# Altium PCB MineSafe.PcbDoc
Units mil, origin at the board's own origin, x right, y up, seen from the top; angles counter-clockwise.
Board outline 3025 x 4000 mil, 2 copper layers (Top Layer, Bottom Layer); 32 components, 29 nets, 154 pads, 40 vias.
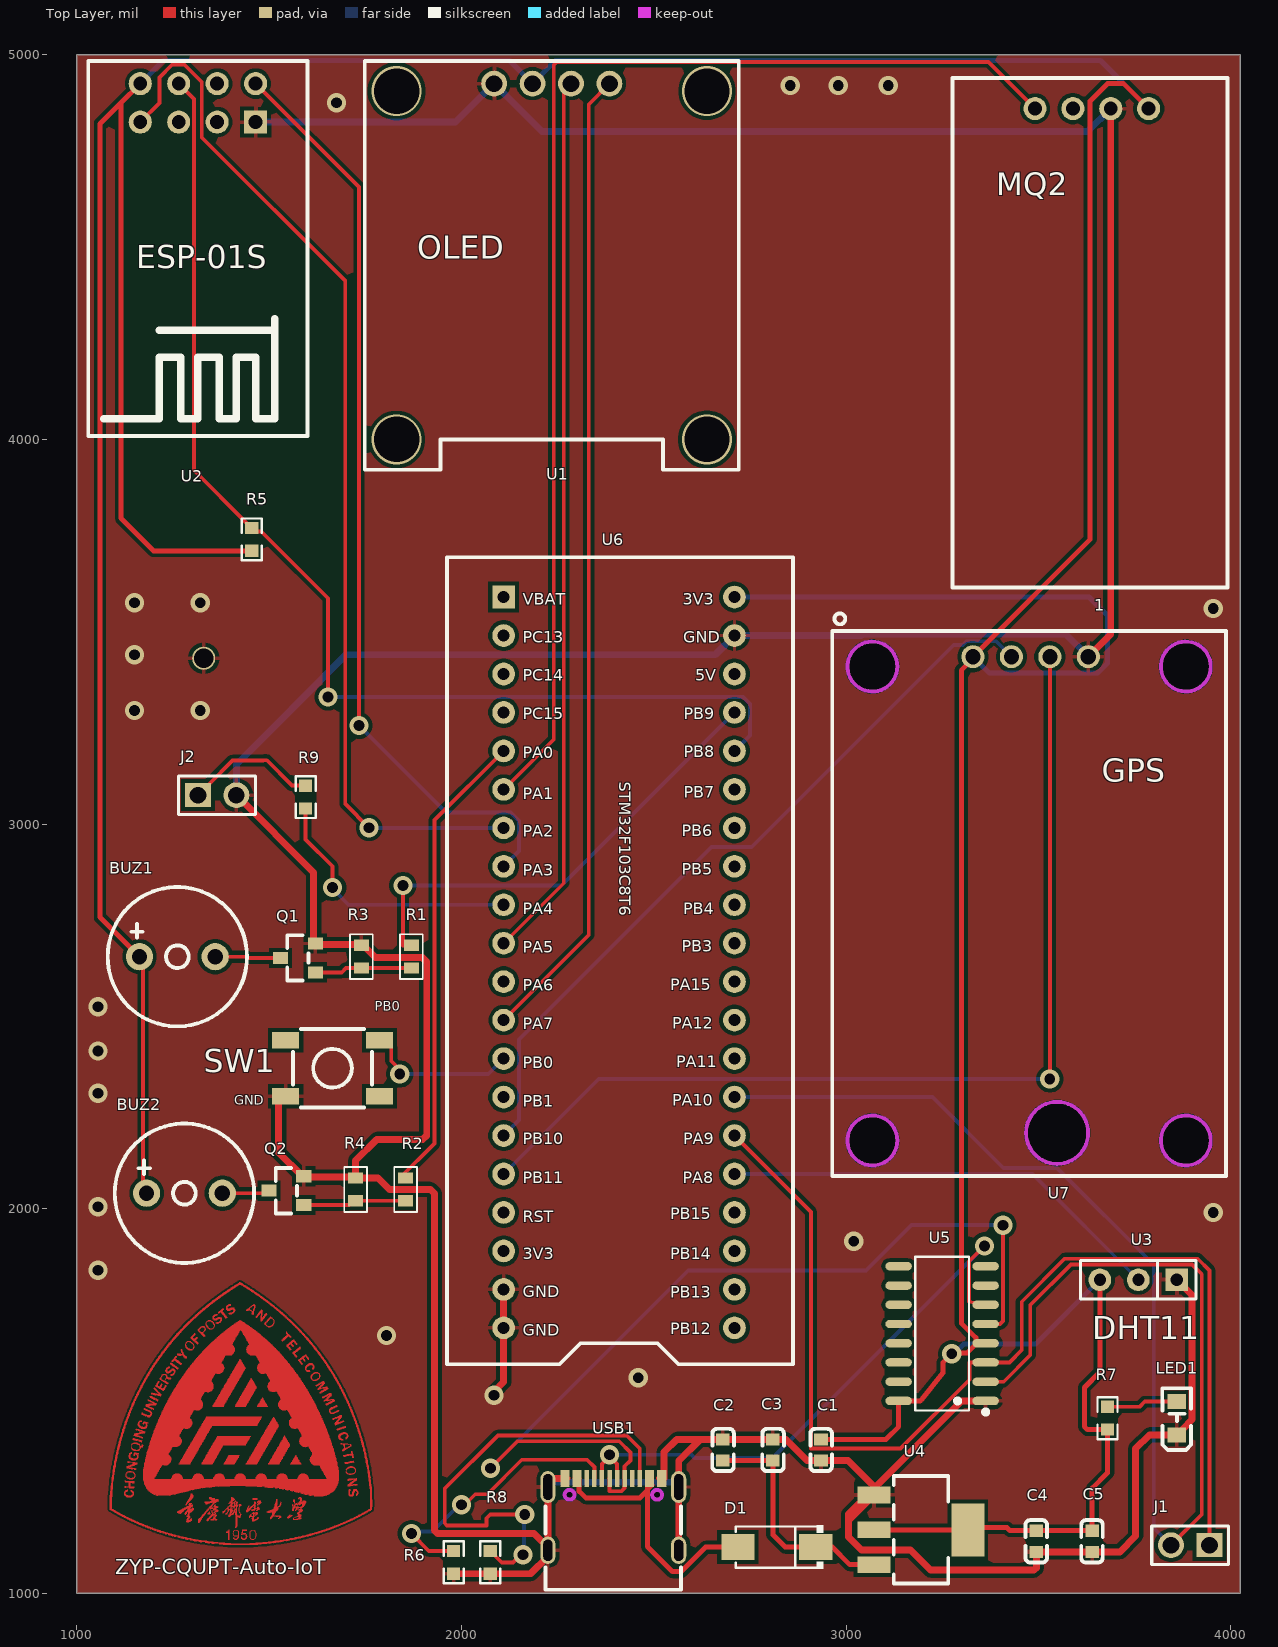
[diagram p0: Top Layer view]
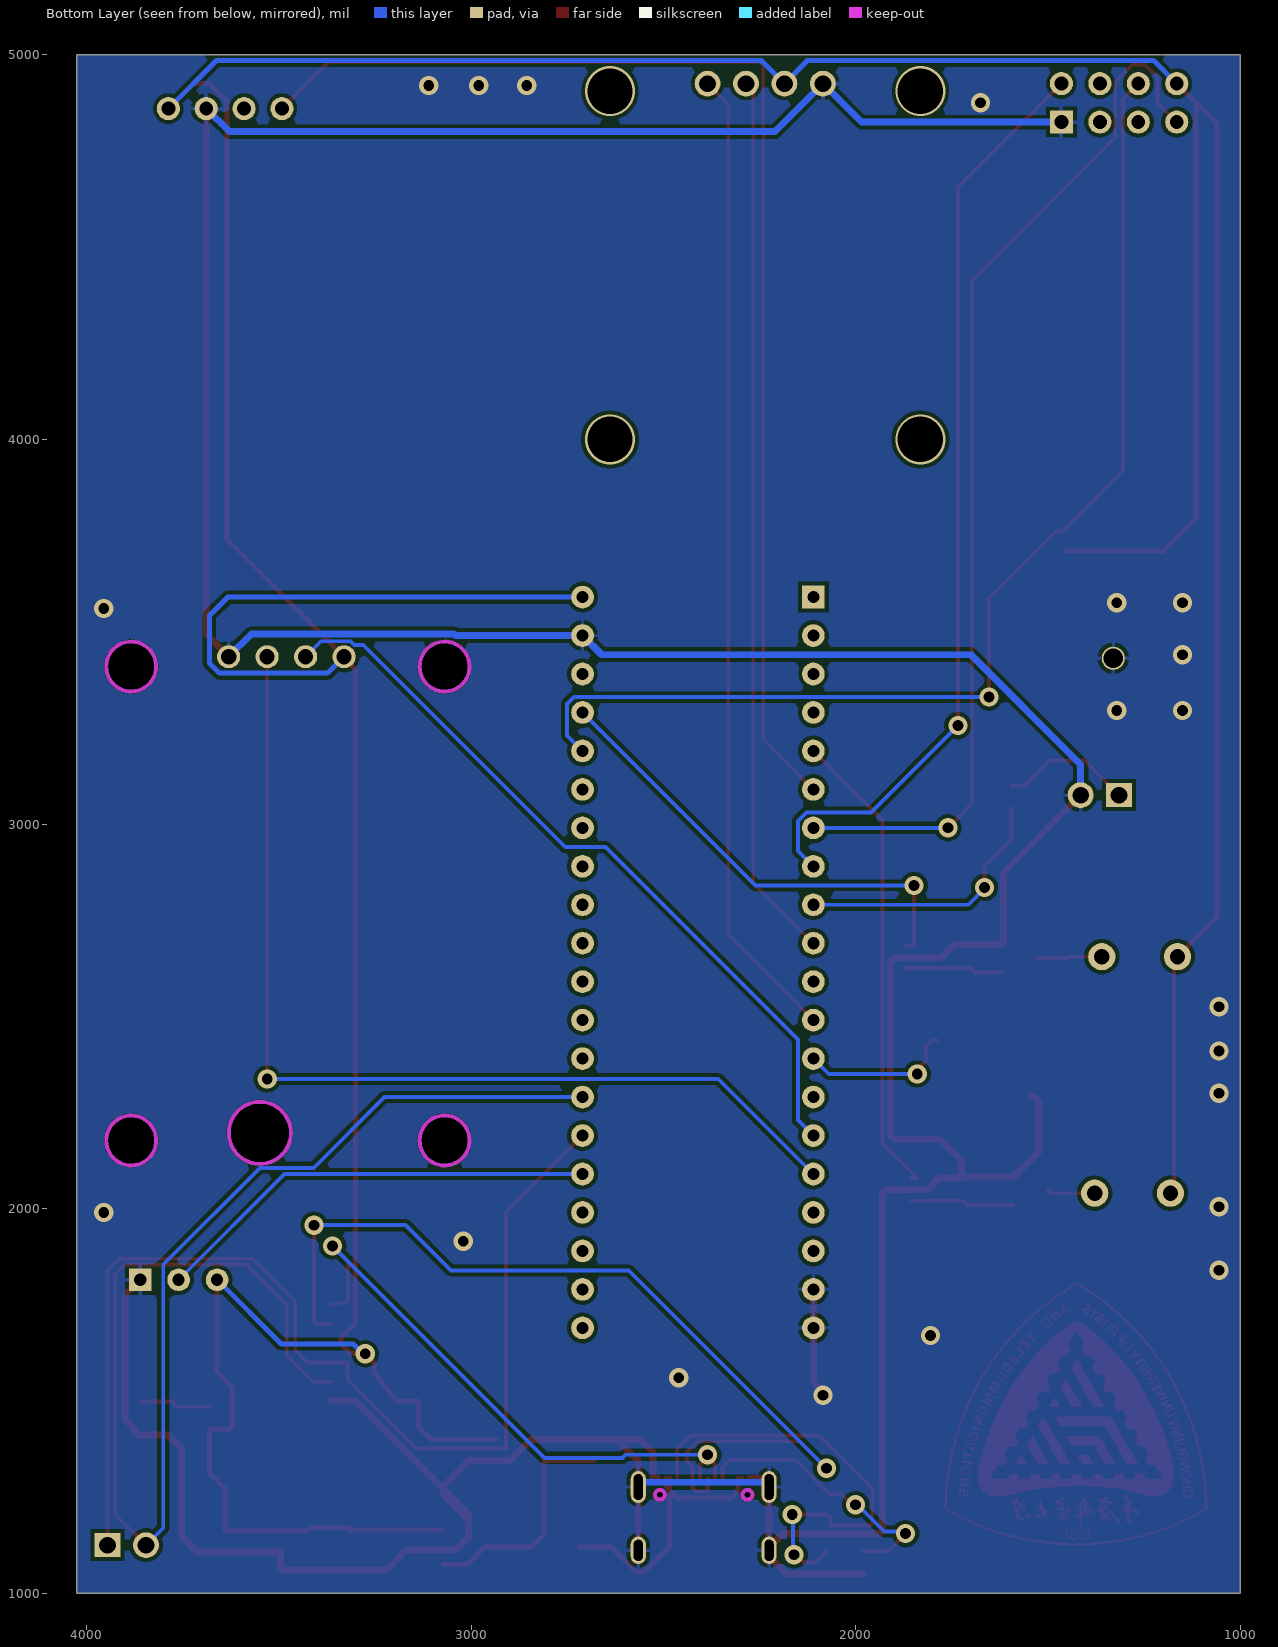
[diagram p1: Bottom Layer view, seen from below]

## Layer stack, top to bottom
Top Solder: solder mask 0.4, Solder Resist, Dk 3.5
Top Layer: signal copper 1.4
Dielectric 1: dielectric 12.6, FR-4, Dk 4.8
Bottom Layer: signal copper 1.4
Bottom Solder: solder mask 0.4, Solder Resist, Dk 3.5

## Board outline
1000,1000 1000,5000 4025,5000 4025,1000

## Design rules (kind name [scope] priority, off if disabled: settings)
Clearance Clearance_ROOM [WithinRoom('RoomDefinition_2')] p1: gap=0 ignorepadtopadclearanceinfootprint=FALSE
Clearance [All] p2: gap=5 ignorepadtopadclearanceinfootprint=FALSE except(3: Arc-SMDPad Track-SMDPad; 10: Arc-Poly Track-Poly SMDPad-Poly THPad-Poly Via-Poly Fill-Poly Poly-Poly)
HoleSize [All] p1: absolutevalues=TRUE maxlimit=128 minlimit=1 maxpercent=80.000 minpercent=20.000
MinimumSolderMaskSliver [All] p1: minsoldermaskwidth=3
PolygonConnect [All] p1: thpad.connectstyle=Relief thpad.reliefconductorwidth=10 thpad.reliefentries=4 thpad.polygonreliefangle="90 Angle" thpad.airgapwidth=10 smdpad.connectstyle=Relief smdpad.reliefconductorwidth=10 smdpad.reliefentries=4 smdpad.polygonreliefangle="90 Angle" smdpad.airgapwidth=10 via.connectstyle=Direct via.reliefconductorwidth=10 via.reliefentries=4 via.polygonreliefangle="90 Angle" via.airgapwidth=10
RoutingVias [All] p1: holewidth=28 width=50 viastyle="Through Hole" minholewidth=28 minwidth=50 maxholewidth=28 maxwidth=50
SilkToSolderMaskClearance [IsPad] p1: minsilkscreentomaskgap=3 clearancetoexposedcopper=TRUE
SolderMaskExpansion [All] p1: expansion=4 istentingtop=FALSE
SupplyNets "Schematic Supply Nets_2" [InNet('VUSB')] p1: voltage=0.000
SupplyNets "Schematic Supply Nets_1" [InNet('VCC')] p2: voltage=0.000
SupplyNets "Schematic Supply Nets" [InNet('GND')] p3: voltage=0.000
Width GND [InNet('GND')] p1: maxlimit=18 minlimit=15 preferedwidth=18 minimp=50.000000 maximp=50.000000 favimp=50.000000
Width VCC [InNetClass('VCC')] p2: maxlimit=13 minlimit=12 preferedwidth=13 minimp=50.000000 maximp=50.000000 favimp=50.000000
Width [All] p3: maxlimit=20 minlimit=10 preferedwidth=10
27 further rules are at their usual default settings.

## Classes and differential pairs
component class MineSafe: 1 BUZ1 BUZ2 C1 C2 C3 C4 C5 D1 J1 J2 LED1 Q1 Q2 R1 R2 R3 R4 R5 R6 R8 R9 SW1 U1 U2 U4 U5 U6 USB1

## Components (designator, comment, footprint, x,y, rotation, side; value= is the part's Value field where it differs from the comment)
1 "MQ2" mq2 2971.85,2625 r270 top
BUZ1 "HNB09A03 3.3V" BUZ-TH_BD9.0-P5.00-D0.6-FD 1261.58,2655 r0 top
BUZ2 "HNB09A03 3.3V" BUZ-TH_BD9.0-P5.00-D0.6-FD 1280,2040 r0 top
C1 "100nF" C0603 2935,1372.44 r270 top
C2 "10uF" C0603 2680,1372.44 r270 top
C3 "100nF" C0603 2810,1372.44 r270 top
C4 "10uF" C0603 3495,1135 r90 top
C5 "100nF" C0603 3640,1135 r90 top
D1 "SS14" SMA_L4.2-W2.6-LS5.3-RD 2820,1120 r180 top
J1 "Debugging port" HDR-M-2.54_1X2 3895,1125 r180 top
J2 "BIGLED" HDR-M-2.54_1X2 1365,3075 r0 top
LED1 "FC-2012HRK-620D" LED0805-RD_RED 3860,1455 r90 top
Q1 "" S8050_SOT-23 1575,2646.71 r0 top
Q2 "" S8050_SOT-23 1545,2041.71 r0 top
R1 "1K" R0603_SMD-CRCW060327R0FKEA 1870,2655 r90 top
R2 "1K" R0603_SMD-CRCW060327R0FKEA 1855,2050 r90 top
R3 "10K" R0603_SMD-CRCW060327R0FKEA 1740,2655 r90 top
R4 "10K" R0603_SMD-CRCW060327R0FKEA 1725,2050 r90 top
R5 "10kΩ" R0603 1455,3740 r270 top
R6 "5.1kΩ" R0603 1980,1080.34 r270 top
R7 "510Ω" R0603 3680,1455 r270 top
R8 "5.1kΩ" R0603 2075,1080.34 r90 top
R9 "510Ω" R0603 1595,3070 r90 top
SW1 "TS-1187A-C-D-B" KEY-SMD_4P-L5.2-W5.2-P3.7-LS6.4-TL 1665,2365 r0 top
U1 "OLED" 0.96oled 1748.78,4984.06 r0 top
U2 "ESP8266-01S" WIFIM-TH_ESP8266-01S 1315,4875 r180 top
U3 "DHT11-Module" HDR-F-2.54_1X3 3760,1820 r180 top
U4 "AMS1117-3.3" SOT-223-3_L6.5-W3.4-P2.30-LS7.0-BR 3195,1165 r180 top
U5 "CH340C" SOP-16_L10.0-W3.9-P1.27-LS6.0-BL 3250,1675 r90 top
U6 "MCU_MHDR" STM32F103C8T6-BLUEPILL 2410,2590 r0 top
U7 "NEO-6M" TH_ATK-NEO-6M 3480,3435 r90 top
USB1 "TYPEC-304A-ACP16L" USB-C-SMD_XUNPU_TYPEC-304A-ACP16L 2395,1205 r0 top

## Footprints (in the part's own frame and the unit in brackets; to place one, negate y for a bottom-side part, rotate by r counter-clockwise, add the part's x,y. Pads: shape width x height; smd on the part's side, far side on the other; paste and mask are expansions set on the pad)
0.96oled [mm]
  round 1.7 hole 1.1: 1(8.54,-1.5) 2(11.08,-1.5) 3(13.62,-1.5) 4(16.16,-1.5)
  silkscreen extent 0,-27 24.7,0
BUZ-TH_BD9.0-P5.00-D0.6-FD [mm]
  round 1.8 hole 1 copper offset 0,0: 1(-2.5,0)
  round 1.8 hole 1: 2(2.5,0)
  silkscreen extent -4.6,-4.6 4.6,4.6
C0603 [mm]
  rect 0.8x0.9 smd paste+0 mask+0.102: 1(-0.7,0) 2(0.7,0)
  silkscreen extent -1.4,-0.7 1.4,0.72
HDR-F-2.54_1X3 [mm]
  rect 1.5x1.5 hole 0.8: 1(-2.54,0.127)
  round 1.5 hole 0.8: 2(0,0.127) 3(2.54,0.127)
  silkscreen extent -3.81,-1.14 3.81,1.4
HDR-M-2.54_1X2 [mm]
  rect 1.7x1.575 hole 1.1 paste-2539.97 mask+0.051: 1(-1.27,0)
  round 1.7 hole 1.1 paste-2539.97 mask+0.051: 2(1.27,0)
  silkscreen extent -2.54,-1.27 2.54,1.27
KEY-SMD_4P-L5.2-W5.2-P3.7-LS6.4-TL [mm]
  rect 1.8x1.1 smd paste+0 mask+0.051: 1(-3.1,1.85) 2(3.1,1.85) 3(-3.1,-1.85) 4(3.1,-1.85)
  silkscreen extent -2.6,-2.6 2.6,2.6
LED0805-RD_RED [mm]
  rect 1x1.25 smd paste+0 mask+0.051: 1(-1.1,0) 2(1.1,0)
  silkscreen extent -2.1,-0.95 1.98,0.96
mq2 [mil]
  round 60 hole 36: 1(-2235,815) 2(-2235,716.58) 3(-2235,618.15) 4(-2235,519.72)
  silkscreen extent -2315,305 -990,1020
R0603 [mil]
  rect 31.75x34.02 smd paste-3937.01 mask+2: 1(-29.66,0) 2(29.66,0)
  silkscreen extent -55,-26 55,26
R0603_SMD-CRCW060327R0FKEA [mm]
  rect 0.75x1 smd: 1(-0.75,0) 2(0.75,0)
  silkscreen extent -1.48,-0.75 1.48,0.75
S8050_SOT-23 [mm]
  rect 1x0.8 smd paste+0 mask+0.051: 1(1.15,-0.823) 2(1.15,1.077) 3(-1.15,0.127)
  silkscreen extent -0.7,-1.37 0.7,1.63
SMA_L4.2-W2.6-LS5.3-RD [mm]
  rect 2.2x1.7 smd paste+0 mask+0.051: 1(-2.565,0) 2(2.565,0)
  silkscreen extent -3.08,-1.44 2.7,1.44
SOP-16_L10.0-W3.9-P1.27-LS6.0-BL [mm]
  oval 0.56x1.745 smd paste+0 mask+0.051: 1(-4.445,-2.872) 2(-3.175,-2.872) 3(-1.905,-2.872) 4(-0.635,-2.872) 5(0.635,-2.872) 6(1.905,-2.872) 7(3.175,-2.872) 8(4.445,-2.872) 9(4.445,2.872) 10(3.175,2.872) 11(1.905,2.872) 12(0.635,2.872) 13(-0.635,2.872) 14(-1.905,2.872) 15(-3.175,2.872) 16(-4.445,2.872)
  silkscreen extent -5.33,-3.02 5.08,1.77
SOT-223-3_L6.5-W3.4-P2.30-LS7.0-BR [mm]
  rect 2.2x1.1 smd paste+0 mask+0.102: 1(3.099,-2.3) 2(3.099,0) 3(3.099,2.3)
  rect 2.2x3.5 smd paste+0 mask+0.102: 4(-3.099,0)
  silkscreen extent -1.8,-3.55 1.8,3.55
STM32F103C8T6-BLUEPILL [mm]
  rect 1.5x1.5 hole 0.8 paste-2539.97 mask+0.051: 1(-7.62,25.4)
  round 1.5 hole 0.8 paste-2539.97 mask+0.051: 2(-7.62,22.86) 3(-7.62,20.32) 4(-7.62,17.78) 5(-7.62,15.24) 6(-7.62,12.7) 7(-7.62,10.16) 8(-7.62,7.62) 9(-7.62,5.08) 10(-7.62,2.54) 11(-7.62,0) 12(-7.62,-2.54) 13(-7.62,-5.08) 14(-7.62,-7.62) 15(-7.62,-10.16) 16(-7.62,-12.7) 17(-7.62,-15.24) 18(-7.62,-17.78) 19(-7.62,-20.32) 20(-7.62,-22.86) 21(7.62,-22.86) 22(7.62,-20.32) 23(7.62,-17.78) 24(7.62,-15.24) 25(7.62,-12.7) 26(7.62,-10.16) 27(7.62,-7.62) 28(7.62,-5.08) 29(7.62,-2.54) 30(7.62,0) 31(7.62,2.54) 32(7.62,5.08) 33(7.62,7.62) 34(7.62,10.16) 35(7.62,12.7) 36(7.62,15.24) 37(7.62,17.78) 38(7.62,20.32) 39(7.62,22.86) 40(7.62,25.4)
  silkscreen extent -11.38,-25.26 11.48,28.03
TH_ATK-NEO-6M [mil]
  round 60 hole 39.37 paste-99999 mask+1.97: 1(0,150) 2(0,50) 3(0,-50) 4(0,-150)
  Keep-Out Layer board cut-out: -1192.91,411.42 -1192.97,417.78 -1195.54,430.24 -1200.49,441.96 -1207.62,452.5 -1216.65,461.46 -1227.26,468.5 -1239.02,473.34 -1251.51,475.81 -1264.23,475.81 -1276.71,473.34 -1288.48,468.5 -1299.08,461.46 -1308.12,452.5 -1315.25,441.96 -1320.19,430.24 -1322.77,417.78 -1322.83,411.42 -1322.77,405.05 -1320.19,392.59 -1315.25,380.87 -1308.12,370.33 -1299.08,361.37 -1288.48,354.34 -1276.71,349.49 -1264.23,347.03 -1251.51,347.03 -1239.02,349.49 -1227.26,354.34 -1216.65,361.37 -1207.62,370.33 -1200.49,380.87 -1195.54,392.59 -1192.97,405.05 -1192.91,411.42 -1192.91,411.42
  Keep-Out Layer board cut-out: 39.37,411.42 39.31,417.78 36.74,430.24 31.79,441.96 24.66,452.5 15.63,461.46 5.02,468.5 -6.74,473.34 -19.23,475.81 -31.95,475.81 -44.43,473.34 -56.2,468.5 -66.8,461.46 -75.84,452.5 -82.97,441.96 -87.91,430.24 -90.49,417.78 -90.55,411.42 -90.49,405.05 -87.91,392.59 -82.97,380.87 -75.84,370.33 -66.8,361.37 -56.2,354.34 -44.43,349.49 -31.95,347.03 -19.23,347.03 -6.74,349.49 5.02,354.34 15.63,361.37 24.66,370.33 31.79,380.87 36.74,392.59 39.31,405.05 39.37,411.42 39.37,411.42
  Keep-Out Layer board cut-out: -1157.47,-68.9 -1157.52,-60.99 -1160.69,-45.47 -1166.82,-30.87 -1175.67,-17.73 -1186.9,-6.57 -1200.09,2.2 -1214.73,8.24 -1230.26,11.31 -1246.1,11.31 -1261.63,8.24 -1276.27,2.2 -1289.46,-6.57 -1300.69,-17.73 -1309.54,-30.87 -1315.67,-45.47 -1318.84,-60.99 -1318.89,-68.9 -1318.89,-68.9 -1318.84,-76.82 -1315.67,-92.34 -1309.54,-106.94 -1300.69,-120.07 -1289.46,-131.24 -1276.27,-140 -1261.63,-146.04 -1246.1,-149.12 -1230.26,-149.12 -1214.73,-146.04 -1200.09,-140 -1186.9,-131.24 -1175.67,-120.07 -1166.82,-106.94 -1160.69,-92.34 -1157.52,-76.82 -1157.47,-68.9 -1157.47,-68.9
  Keep-Out Layer board cut-out: -1192.91,-403.54 -1192.97,-397.18 -1195.54,-384.72 -1200.49,-373 -1207.62,-362.46 -1216.65,-353.5 -1227.26,-346.46 -1239.02,-341.62 -1251.51,-339.15 -1264.23,-339.15 -1276.71,-341.62 -1288.48,-346.46 -1299.08,-353.5 -1308.12,-362.46 -1315.25,-373 -1320.19,-384.72 -1322.77,-397.18 -1322.83,-403.54 -1322.77,-409.91 -1320.19,-422.37 -1315.25,-434.09 -1308.12,-444.63 -1299.08,-453.59 -1288.48,-460.62 -1276.71,-465.47 -1264.23,-467.93 -1251.51,-467.93 -1239.02,-465.47 -1227.26,-460.62 -1216.65,-453.59 -1207.62,-444.63 -1200.49,-434.09 -1195.54,-422.37 -1192.97,-409.91 -1192.91,-403.54 -1192.91,-403.54
  Keep-Out Layer board cut-out: 39.37,-403.54 39.31,-397.18 36.74,-384.72 31.79,-373 24.66,-362.46 15.63,-353.5 5.02,-346.46 -6.74,-341.62 -19.23,-339.15 -31.95,-339.15 -44.43,-341.62 -56.2,-346.46 -66.8,-353.5 -75.84,-362.46 -82.97,-373 -87.91,-384.72 -90.49,-397.18 -90.55,-403.54 -90.49,-409.91 -87.91,-422.37 -82.97,-434.09 -75.84,-444.63 -66.8,-453.59 -56.2,-460.62 -44.43,-465.47 -31.95,-467.93 -19.23,-467.93 -6.74,-465.47 5.02,-460.62 15.63,-453.59 24.66,-444.63 31.79,-434.09 36.74,-422.37 39.31,-409.91 39.37,-403.54 39.37,-403.54
  Keep-Out Layer circle w0.2: c-1257.87,411.42 r64.96
  Keep-Out Layer circle w10: c-1257.87,411.42 r64.96
  Keep-Out Layer circle w0.2: c-25.59,411.42 r64.96
  Keep-Out Layer circle w10: c-25.59,411.42 r64.96
  Keep-Out Layer circle w0.2: c-1238.18,-68.9 r80.71
  Keep-Out Layer circle w10: c-1238.18,-68.9 r80.71
  Keep-Out Layer circle w0.2: c-1257.87,-403.54 r64.96
  Keep-Out Layer circle w10: c-1257.87,-403.54 r64.96
  Keep-Out Layer circle w0.2: c-25.59,-403.54 r64.96
  Keep-Out Layer circle w10: c-25.59,-403.54 r64.96
  silkscreen extent -1350,-508 113,516
USB-C-SMD_XUNPU_TYPEC-304A-ACP16L [mm]
  oval 1x2.1 hole 0.6 slot 1.7 at 90 deg paste-2539.97 mask+0.05: 25(4.32,1.807) 28(-4.32,1.807)
  oval 1x1.8 hole 0.6 slot 1.4 at 90 deg paste-2539.97 mask+0.05: 26(4.32,-2.373) 27(-4.32,-2.373)
  rect 0.3x1.15 smd paste-100 mask+0.05: A1(-3.35,2.373) A4(-2.55,2.373) A5(-1.25,2.373) A6(-0.25,2.373) A7(0.25,2.373) A8(1.25,2.373) A9(2.55,2.373) A12(3.35,2.373) B1(3.05,2.373) B4(2.25,2.373) B5(1.75,2.373) B6(0.75,2.373) B7(-0.75,2.373) B8(-1.75,2.373) B9(-2.25,2.373) B12(-3.05,2.373)
  Keep-Out Layer board cut-out: -2.565,1.295 -2.566,1.359 -2.617,1.476 -2.708,1.566 -2.826,1.614 -2.954,1.614 -3.072,1.566 -3.163,1.476 -3.214,1.359 -3.215,1.295 -3.215,1.295 -3.214,1.232 -3.163,1.114 -3.072,1.025 -2.954,0.977 -2.826,0.977 -2.708,1.025 -2.617,1.114 -2.566,1.232 -2.565,1.295 -2.565,1.295
  Keep-Out Layer board cut-out: 3.215,1.295 3.214,1.359 3.163,1.476 3.072,1.566 2.954,1.614 2.826,1.614 2.708,1.566 2.617,1.476 2.566,1.359 2.565,1.295 2.565,1.295 2.566,1.232 2.617,1.114 2.708,1.025 2.826,0.977 2.954,0.977 3.072,1.025 3.163,1.114 3.214,1.232 3.215,1.295 3.215,1.295
  Keep-Out Layer circle w0.005: c-2.89,1.295 r0.325
  Keep-Out Layer circle w0.254: c-2.89,1.295 r0.325
  Keep-Out Layer circle w0.005: c2.89,1.295 r0.325
  Keep-Out Layer circle w0.254: c2.89,1.295 r0.325
  silkscreen extent -4.47,-4.97 4.47,0.54
WIFIM-TH_ESP8266-01S [mil]
  rect 60x60 hole 36 paste-99999 mask+1.97: 1(-150,50)
  round 60 hole 36 paste-99999 mask+1.97: 2(-50,50) 3(50,50) 4(150,50) 5(-150,-50) 6(-50,-50) 7(50,-50) 8(150,-50)
  silkscreen extent -285,-109 285,866

## Part data
BUZ1 BUZ2: Manufacturer="Jiangsu Huaneng Elec", Manufacturer Part=HNB09A03, Contributor=LCSC, spicePre=B, spiceSymbolName="HNB09A03 3.3V", Supplier=LCSC, Supplier Part=C96102
C1 C3 C5: JLCPCB Part Class=Basic, JLCPCB SMD=Yes, Manufacturer=YAGEO, Manufacturer Part=CC0603KRX7R9BB104, Add into BOM=yes, Convert to PCB=yes, Device=100nF, nameAlias=Capacitance, Origin Footprint=C0603, spicePre=C, spiceSymbolName=CC0603KRX7R9BB104, Supplier=LCSC, Supplier Part=C14663, Symbol=100nF
C2 C4: Manufacturer=FH, Manufacturer Part=0603X106K160NT, Add into BOM=yes, Convert to PCB=yes, Device=10uF, nameAlias=Capacitance, Origin Footprint=C0603, spicePre=C, spiceSymbolName=0603X106K160NT, Supplier=LCSC, Supplier Part=C70225, Symbol=10uF
D1: JLCPCB Part Class="Basic Part", Manufacturer=MDD, Add into BOM=yes, Convert to PCB=yes, Device=SS14, Manufacturer Part=SS14, Origin Footprint=SMA_L4.2-W2.6-LS5.3-RD, spicePre=D, spiceSymbolName=SS14, Supplier=LCSC, Supplier Part=C2480, Symbol=SS14
J1 J2: library part HDR-M-2.54_1x2, Add into BOM=yes, Contributor=LCEDA_Lib, Convert to PCB=yes, Device=HDR-M-2.54_1x2, Origin Footprint=HDR-M-2.54_1X2, spicePre=J, spiceSymbolName=HDR-M-2.54_1x2, Supplier=LCSC, Supplier Part=C124375, Symbol=HDR-M-2.54_1x2
LED1: JLCPCB Part Class="Basic Part", Manufacturer=NATIONSTAR, Add into BOM=yes, Convert to PCB=yes, Device=FC-2012HRK-620D, Manufacturer Part=FC-2012HRK-620D, Origin Footprint=LED0805-RD_RED, spicePre=L, spiceSymbolName=FC-2012HRK-620D, Supplier=LCSC, Supplier Part=C84256, Symbol=FC-2012HRK-620D
Q1 Q2: library part S8050_SOT_NPN, Add into BOM=yes, Convert to PCB=yes, Device=S8050_SOT_NPN, Supplier Footprint=SOT-23, Symbol=NPN
R1 R2: LCSC Assembly=Yes, Manufacturer=UniOhm, Manufacturer Part=0603WAF1001T5E, nameAlias="Resistance (Ohms)", SMT Type=Basic, spicePre=R, spiceSymbolName=0603WAF1001T5E, Supplier=LCSC, Supplier Part=C21190
R3 R4: LCSC Assembly=Yes, Manufacturer=UniOhm, Manufacturer Part=0603WAF1002T5E, nameAlias="Resistance (Ohms)", SMT Type=Basic, spicePre=R, spiceSymbolName=0603WAF1002T5E, Supplier=LCSC, Supplier Part=C25804
R5: JLCPCB Part Class="Basic Part", Manufacturer=UNI-ROYAL(厚声), Manufacturer Part=0603WAF1002T5E, Resistance=10K, Add into BOM=yes, Convert to PCB=yes, Device=10kΩ, nameAlias=Resistance, Origin Footprint=R0603, spicePre=R, spiceSymbolName=0603WAF1002T5E, Supplier=LCSC, Supplier Part=C25804, Symbol=10kΩ
R6 R8: JLCPCB Part Class="Basic Part", Manufacturer=UniOhm, Manufacturer Part=0603WAF5101T5E, Resistance=5.1K, Add into BOM=yes, Convert to PCB=yes, Device=5.1kΩ, nameAlias=Resistance, Origin Footprint=R0603, spicePre=R, spiceSymbolName=0603WAF5101T5E, Supplier=LCSC, Supplier Part=C23186, Symbol=5.1kΩ
R7 R9: JLCPCB Part Class="Basic Part", Manufacturer=UniOhm, Manufacturer Part=0603WAF5100T5E, Resistance=510, Add into BOM=yes, Convert to PCB=yes, Device=510Ω, nameAlias=Resistance, Origin Footprint=R0603, spicePre=R, spiceSymbolName=0603WAF5100T5E, Supplier=LCSC, Supplier Part=C23193, Symbol=510Ω
SW1: JLCPCB Part Class="Extended Part", Manufacturer="XKB Connectivity(中国星坤)", Add into BOM=yes, Contributor=LCSC, Convert to PCB=yes, Device=TS-1187A-C-D-B, Manufacturer Part=TS-1187A-C-D-B, Origin Footprint=KEY-SMD_4P-L5.2-W5.2-P3.7-LS6.4-TL, spicePre=S, spiceSymbolName=TS-1187A-C-D-B, Supplier=LCSC, Supplier Part=C318888, Symbol=TS-1187A-C-D-B
U1: library part 0.96OLED, Add into BOM=yes, Convert to PCB=yes, Device=0.96OLED, Symbol=0.96OLED
U2: JLCPCB Part Class=扩展库, Add into BOM=yes, Convert to PCB=yes, Device=ESP8266-01S, LCSC Part Name=ESP8266-01S, Manufacturer Part=ESP8266-01S, Supplier=LCSC, Supplier Footprint=TH-8P, Supplier Part=C9900150497, Symbol=ESP8266-01S
U4: JLCPCB Part Class=Basic, JLCPCB SMD=Yes, Manufacturer=AMS, Add into BOM=yes, Convert to PCB=yes, Device=AMS1117-3.3, image=//image.lceda.cn/szlcsc/C6186.jpg, Manufacturer Part=AMS1117-3.3, Origin Footprint=SOT-223-3_L6.5-W3.4-P2.30-LS7.0-BR, sourceId=dwIGgezVh, spicePre=U, spiceSymbolName=AMS1117-3.3, Supplier=LCSC, Supplier Part=C6186, Symbol=AMS1117-3.3, timeStamp=1476261164
U5: JLCPCB Part Class="Extended Part", Manufacturer=WCH, Add into BOM=yes, Convert to PCB=yes, Device=CH340C, Manufacturer Part=CH340C, Origin Footprint=SOP-16_L10.0-W3.9-P1.27-LS6.0-BL, spicePre=U, spiceSymbolName=CH340C, Supplier=LCSC, Supplier Part=C84681, Symbol=CH340C
U6: library part STM32F103C8T6-Bluepill, Add into BOM=yes, Contributor=drswith, Convert to PCB=yes, Device=STM32F103C8T6-Bluepill, Origin Footprint=STM32F103C8T6-BLUEPILL, spicePre=U, spiceSymbolName=STM32F103C8T6-Bluepill, Symbol=STM32F103C8T6-Bluepill
U7: library part ATK-NEO-6M, JLCPCB Part Class=扩展库, Add into BOM=yes, Convert to PCB=yes, Device=ATK-NEO-6M, LCSC Part Name=ATK-NEO-6M, Manufacturer Part=ATK-NEO-6M, Supplier=LCSC, Supplier Footprint="THrough hole", Supplier Part=C9900025554, Symbol=ATK-NEO-6M
USB1: JLCPCB Part Class="Extended Part", Manufacturer=XUNPU(讯普), Add into BOM=yes, Contributor=LCSC, Convert to PCB=yes, Device=TYPEC-304A-ACP16L, Manufacturer Part=TYPEC-304A-ACP16L, Origin Footprint=USB-C-SMD_XUNPU_TYPEC-304A-ACP16L, spicePre=U, spiceSymbolName=TYPEC-304A-ACP16L, Supplier=LCSC, Supplier Part=C2909609, Symbol=TYPEC-304A-ACP16L
1: Add into BOM=yes, Convert to PCB=yes, Device=MQ2, Symbol=MQ2
U3: Add into BOM=yes, Contributor=drswith, Convert to PCB=yes, Device=DHT11-Module, Origin Footprint=HDR-F-2.54_1X3, spicePre=U, spiceSymbolName=DHT11-Module, Symbol=DHT11-Module

## Free pads (board coordinates)
  round 60 hole 50: 1(1330,3431)

## Via types
v1: diameter 50, hole 28, Top Layer to Bottom Layer, 36 vias
v2: diameter 129.92, hole 118.11, Top Layer to Bottom Layer, 4 vias

## Nets (pads, with @x,y where several pads share a name; then routed paths per layer and width w, separated by ;. In a path a pad name is that pad's centre, name@x,y a point inside that pad or via, vN(x,y) a via of type N, cw(c..) or ccw(c..) an arc to the next point about the centre after c; other vN are vias at no path point)
+5V: C2.2 C3.2 D1.1 U4.3 | length 618
  Top Layer w13: C2.2 C3.2 2810,1152 2842,1120 D1.1 2964.45,1120 3010,1074.45 U4.3
CC1: R6.1 USB1.A5 | length 721.4
  Top Layer w10: v1(1870,1155) 1915,1110 R6.1 ; v1(2000,1230) 2008.64,1230 2036.14,1257.5 2067.5,1257.5 2157,1347 2326.79,1347 2345.79,1328 USB1.A5
  Bottom Layer w10: v1(1870,1155) 1875.55,1160.55 1925.55,1160.55 1995,1230 v1(2000,1230)
CC2: R8.2 USB1.B5 | length 1192.4
  Top Layer w10: R8.2 2105,1080 2134.14,1080 2154.14,1100 v1(2160,1100) ; v1(2165,1205) 2075,1205 2065,1195 2065,1176 1962.71,1176 1956.85,1181.86 1956.85,1271.85 2095,1410 2429.9,1410 2463.9,1376 USB1.B5
  Bottom Layer w10: v1(2160,1100) 2162.5,1102.5 2162.5,1202.5 v1(2165,1205)
GND: 1.2 C1.2 C2.1 C3.1 C4.1 C5.1 J2.2 LED1.1 pad.1 Q1.2 Q2.2 R3.2 R4.2 R6.2 R8.1 SW1.3 U1.1 U2.1 U3.1 U4.1 U5.1 U6.19 U6.20 U6.39 U7.4 USB1.25 USB1.26 USB1.27 USB1.28 USB1.A1 USB1.A12 USB1.B1 USB1.B12 | length 13964
  Top Layer w17: USB1.A1 USB1.B12 ; USB1.B1 USB1.A12
  Top Layer w18: J2.2 1616,2874 1616,2689.11 Q1.2 1622.57,2686.82 1737.71,2686.82 R3.2 1744.92,2684.53 1776.14,2653.31 1898.39,2653.31 1904.73,2646.97 1910,2641.69 1910,2190.54 1899.46,2180 1780,2180 1725,2125 R4.2 ; SW1.3 1537.65,2292.17 1525,2279.52 1525,2145.45 1586.34,2084.11 Q2.2 1592.57,2081.82 1722.71,2081.82 R4.2 ; R6.2 R8.1 2179.76,1050.68 2224.92,1095.84 USB1.27 USB1.27@2224.92,1119.39 ; v1(2085,1515) 2085,1523.66 2110,1548.66 U6.20 U6.19 ; USB1.A1 2263.11,1298 2224.92,1298 USB1.28 USB1.27@2224.92,1119.39 ; USB1.A12 2526.89,1366.89 2560,1400 2621.08,1400 ; USB1.26 USB1.25 2565.08,1344 2621.08,1400 ; U4.1 3006,1188.55 ; U5.1 3300,1500 U4.1@3074.94,1274.94 ; U7.4 3688.43,3493.43 1.2 ; U3.1 3900,1775 3900,1451.69 3875.61,1427.3 3875.61,1422.38 3864.92,1411.69 LED1.1 3788.69,1411.69 3753,1376 3753,1148.44 3712,1107.44 C5.1 C4.1 3495,1065.86 3489.14,1060 3220,1060 3168,1112 3040,1112 3006,1146 3006,1188.55 ; R4.2 1783.58,2079.53 1813.11,2050 1919.45,2050 1929.99,2039.46 1929.99,1162.69 1937.68,1155 2189.31,1155 USB1.27@2224.92,1119.39 ; 2621.08,1400 C2.1 C3.1 2844,1400 2899.12,1344.88 C1.2 3005,1344.88 U4.1@3074.94,1274.94 ; 3006,1188.55 3006,1206 U4.1@3074.94,1274.94
  Bottom Layer w18: J2.2 1415,3155 1700,3440 2660,3440 U6.39 3039.7,3490 3043.7,3494 3571,3494 U7.4 ; U2.1 1985,4825 U1.1 2210,4800 3628.43,4800 1.2 ; USB1.28 2224.92,1278.59 2234.79,1288.46 2555.21,1288.46 2565.08,1278.59 USB1.25
  other v1: 2460,1560 1805,1670 1055,1840 3020,1915 3955,1990 1055,2005 1055,2300 1055,2410 1055,2525 1150,3295 1321,3295 1150,3440 3955,3560 1150,3575 1321,3575 1675,4875 2855,4920 2980,4920 3110,4920
NetBUZ1_2: BUZ1.2 Q1.3 | length 171.1
  Top Layer w10: BUZ1.2 1443,2655 1446.29,2651.71 Q1.3
NetBUZ2_2: BUZ2.2 Q2.3 | length 124.1
  Top Layer w10: BUZ2.2 1493.01,2040 Q2.3
NetJ2_1: J2.1 R9.2 | length 346.5
  Top Layer w10: J2.1 1317.46,3075 1343.46,3101 1343.46,3103.46 1405,3165 1485,3165 1485.86,3165.86 1494.14,3165.86 1560,3100 1594.66,3100 R9.2
NetLED1_2: LED1.2 R7.1 | length 185.7
  Top Layer w10: R7.1 3763,1484.66 3776.65,1498.31 LED1.2
NetQ1_1: Q1.1 R1.1 R3.1 | length 254.3
  Top Layer w10: Q1.1 1689,2614.31 1700.16,2625.47 R3.1 R1.1
NetQ2_1: Q2.1 R2.1 R4.1 | length 269.3
  Top Layer w10: Q2.1 1708.91,2009.31 1720.08,2020.47 R4.1 R2.1
PA0: R2.2 U6.5 | length 1237.4
  Top Layer w10: R2.2 1839.92,2079.53 1930,2169.61 1930,3010 U6.5
PA1: 1.4 U6.6 | length 3241.9
  Top Layer w10: U6.6 2240,3220 2240,4973 2248,4981 3370.57,4981 1.4
PA2: U2.4 U6.7 | length 2748.2
  Top Layer w10: U2.4 1215,4875 1215,4941 1248,4974 1280,4974 1325,4929 1325,4785 1698.23,4411.77 1698.23,3051.77 v1(1760,2990)
  Bottom Layer w10: v1(1760,2990) U6.7
PA3: U2.5 U6.8 | length 2433.7
  Top Layer w10: U2.5 1734,4656 v1(1734,3256)
  Bottom Layer w10: v1(1734,3256) 1960,3030 2128,3030 2150,3008 2150,2930 U6.8
PA4: R9.1 U6.9 | length 700.9
  Top Layer w10: R9.1@1596.13,3040.34 R9.1 1595,2960.14 1665,2890.14 v1(1665,2835)
  Bottom Layer w10: v1(1665,2835) 1665,2831.91 1706.91,2790 U6.9
PA5: U1.3 U6.10 | length 2307.5
  Top Layer w10: U6.10 2266,2846 2266,4906 U1.3
PA7: U1.4 U6.12 | length 2548.9
  Top Layer w10: U6.12 2331,2711 2331,4871 U1.4
PA8: U3.2 U6.25 | length 1163.9
  Bottom Layer w10: U6.25 3485,2090 U3.2
PA9: J1.1 U5.3 U6.26 | length 2963.7
  Top Layer w10: U6.26 2909,1991 2909,1376 3142,1376 3321,1555 3321,1600 U5.3 3425,1600 3457,1632 3457,1758 3568.53,1869.53 3914.53,1869.53 3945,1839.06 J1.1
PA10: J1.2 U5.2 U6.27 | length 3531
  Top Layer w10: U5.2 3410,1550 3479,1619 3479,1749 3584.53,1854.53 3900,1854.53 3925,1829.53 3925,1205 J1.2
  Bottom Layer w10: U6.27 3225,2290 3409,2106 3549,2106 3800,1855 3800,1170 J1.2
PB0: SW1.2 U6.13 | length 404.4
  Top Layer w10: SW1.2 1800.83,2437.83 1817.48,2421.18 1817.48,2383.34 1840,2360.82 v1(1840,2350)
  Bottom Layer w10: v1(1840,2350) 2070,2350 U6.13
PB8: R5.1 U2.7 U6.36 | length 3008.4
  Top Layer w10: U2.7 1305,4885 1305,3919.66 1442.99,3781.67 1442.99,3780.54 1453.87,3769.66 R5.1 1464.38,3760.28 1479.72,3760.28 1653,3587 v1(1653,3330)
  Bottom Layer w10: v1(1653,3330) 2732,3330 2750,3312 2750,3230 U6.36
PB9: R1.2 U6.37 | length 1225.9
  Top Layer w10: v1(1848,2840) 1848,2684.53 R1.2
  Bottom Layer w10: v1(1848,2840) 2260,2840 U6.37
PB10: U6.15 U7.2 | length 1991.8
  Bottom Layer w10: U6.15 2150,2230 2150,2440 2650,2940 2755,2940 3280,3465 3303.44,3465 3313.43,3475 3390,3475 U7.2
PB11: U6.16 U7.3 | length 2620.3
  Top Layer w10: v1(3530,2337) U7.3
  Bottom Layer w10: U6.16 2357,2337 v1(3530,2337)
USB_D+: U5.5 USB1.A6 USB1.B6 | length 2470.9
  Top Layer w10: v1(2076,1325) 2146,1395 2410.47,1395 2440,1365.47 2440,1345.47 2424.53,1330 USB1.B6 2424.53,1273.53 2416,1265 2385.16,1265 USB1.A6 ; U5.5 3400,1700 3408,1708 v1(3408,1957)
  Bottom Layer w10: v1(2076,1325) 2590,1839 3052,1839 3170,1957 v1(3408,1957)
USB_D-: U5.6 USB1.A7 USB1.B7 | length 1551.4
  Top Layer w10: USB1.B7 2365.47,1335.66 2385,1355.19 v1(2385,1360) 2385,1355.5 2404.84,1335.66 USB1.A7 ; v1(3360,1903) 3320,1863 3320,1758 U5.6
  Bottom Layer w10: v1(2385,1360) 2598.41,1360 2606.41,1352 2809,1352 v1(3360,1903)
VCC: 1.1 BUZ1.1 BUZ2.1 C1.1 C4.2 C5.2 R5.2 R7.2 U1.2 U2.8 U3.3 U4.2 U4.4 U5.4 U5.16 U6.40 U7.1 | length 14611.5
  Top Layer w10: BUZ1.1 1172.37,2645.78 1172.37,2049.2 BUZ2.1
  Top Layer w13: BUZ1.1 1060.34,2757.81 1060.34,3070 1060.34,4820.34 1115,4875 ; U2.8 1115,4875 ; R5.2 1199.66,3710.34 1115,3795 1115,4875 ; C1.1 3104,1400 3136.91,1432.91 U5.16 3192.45,1500 3195.74,1503.29 3252.45,1573.01 3252.45,1600.16 v1(3274.84,1622.55) 3277.37,1625.08 3314.84,1625.08 3339.76,1650 3343.02,1650 3337.46,1655.56 3337.46,1664.31 3300,1701.77 3300,3399.65 3330,3429.65 U7.1 3635,3740 3635,4880 3680,4925 3721.85,4925 1.1 ; U4.2 U4.4 3317,1170.78 3418.22,1170.78 3426.44,1162.56 C4.2 C5.2 3640,1273 3680,1313 R7.2 3627.62,1425.34 3620,1432.96 3620,1535 3660,1575 U3.3
  Bottom Layer w13: U2.8 1225,4985 2125,4985 U1.2 2245,4985 3661.85,4985 1.1 ; U6.40 3632,3590 3680,3542 3680,3418 3654,3392 3373,3392 U7.1 ; v1(3274.84,1622.55) 3280.51,1622.55 3305.96,1648 3493,1648 U3.3
VUSB: D1.2 USB1.A4 USB1.A9 USB1.B4 USB1.B9 | length 751.1
  Top Layer w12: USB1.A4 USB1.B9 ; USB1.B4 USB1.A9 USB1.A9@2495.39,1282
  Top Layer w13: USB1.B9 2306.42,1265 2323.42,1248 2464.58,1248 2483.58,1267 USB1.B4 ; USB1.A9@2495.39,1282 2484,1270.61 2484,1121 2549,1056 2571,1056 2635,1120 D1.2
pads on no net: 1.3 SW1.1 SW1.4 U2.2 U2.3 U2.6 U5.7 U5.8 U5.9 U5.10 U5.11 U5.12 U5.13 U5.14 U5.15 U6.1 U6.2 U6.3 U6.4 U6.11 U6.14 U6.17 U6.18 U6.21 U6.22 U6.23 U6.24 U6.28 U6.29 U6.30 U6.31 U6.32 U6.33 U6.34 U6.35 U6.38 USB1.A8 USB1.B8
copper on no net:
  other v2: 1831.46,3999.8 2638.54,3999.8 1831.46,4905.31 2638.54,4905.31

## Polygon pours and split planes (outlines as drawn)
GND on Top Layer "GND_L01_P000" (solid, remove dead copper, pour order 0): 4025,1000 4025,5000 1000,5000 1000,1000
GND on Bottom Layer "GND_L02_P001" (solid, pour order 1): 1000,5000 1000,1000 4025,1000 4025,5000

## Other copper
Top Layer:
  drawing of 84 lines, arcs and shapes, not listed

## Silkscreen, mask and mechanical layers (free items; w line width, h text height)
Top Overlay:
  text "MQ2" at 3390,4614.94 h100
  text "OLED" at 1885,4470 h60
  text "ESP-01S" at 1155,4445 h60
  text "GPS" at 3665,3110 h60
  text "PB0" at 1775,2515 h25
  text "GND" at 1410,2270 h25
  text "DHT11" at 3640,1660 h60
  text "ZYP-CQUPT-Auto-IoT" at 1100,1050 h39
Mechanical 1:
  the board outline again, w10

## Text inside footprints (layer, text, board x,y; h text height)
U6: Top Overlay "STM32F103C8T6" at 2410,3110 h30 r270; Top Overlay "PB12" at 2543,1673 h30; Top Overlay "PB13" at 2543,1768 h30; Top Overlay "PB14" at 2543,1868 h30; Top Overlay "PB15" at 2543,1973 h30; Top Overlay "PA8" at 2575,2066 h30; Top Overlay "PA9" at 2576.6,2167 h30; Top Overlay "PA10" at 2548,2268 h30; Top Overlay "PA11" at 2558,2368 h30; Top Overlay "PA12" at 2548,2468 h30; Top Overlay "PA15" at 2543,2568 h30; Top Overlay "PB3" at 2573,2668 h30; Top Overlay "PB4" at 2576.6,2765 h30; Top Overlay "PB5" at 2573,2868 h30; Top Overlay "PB6" at 2573,2968 h30; Top Overlay "PB7" at 2578,3068 h30; Top Overlay "PB8" at 2578,3173 h30; Top Overlay "PB9" at 2578,3273 h30; Top Overlay "5V" at 2607.8,3373 h30; Top Overlay "GND" at 2576.6,3471 h30; Top Overlay "3V3" at 2575,3570 h30; Top Overlay "GND" at 2159,1669 h30; Top Overlay "GND" at 2159,1770 h30; Top Overlay "3V3" at 2159,1868 h30; Top Overlay "RST" at 2159,1965 h30; Top Overlay "PB11" at 2159,2066 h30; Top Overlay "PB10" at 2159,2167 h30; Top Overlay "PB1" at 2159,2265 h30; Top Overlay "PB0" at 2159,2365 h30; Top Overlay "PA7" at 2159,2466 h30; Top Overlay "PA6" at 2159,2567 h30; Top Overlay "PA5" at 2159,2665 h30; Top Overlay "PA4" at 2159,2765 h30; Top Overlay "PA3" at 2159,2866 h30; Top Overlay "PA2" at 2159,2967 h30; Top Overlay "PA1" at 2159,3065 h30; Top Overlay "PA0" at 2159,3171 h30; Top Overlay "PC15" at 2159,3272 h30; Top Overlay "PC14" at 2159,3373 h30; Top Overlay "PC13" at 2159,3471 h30; Top Overlay "VBAT" at 2159,3570 h30